# EAGLE board 2009_12_01_sevenSegmentWatch_01_01_PANEL (EAGLE 4.16)
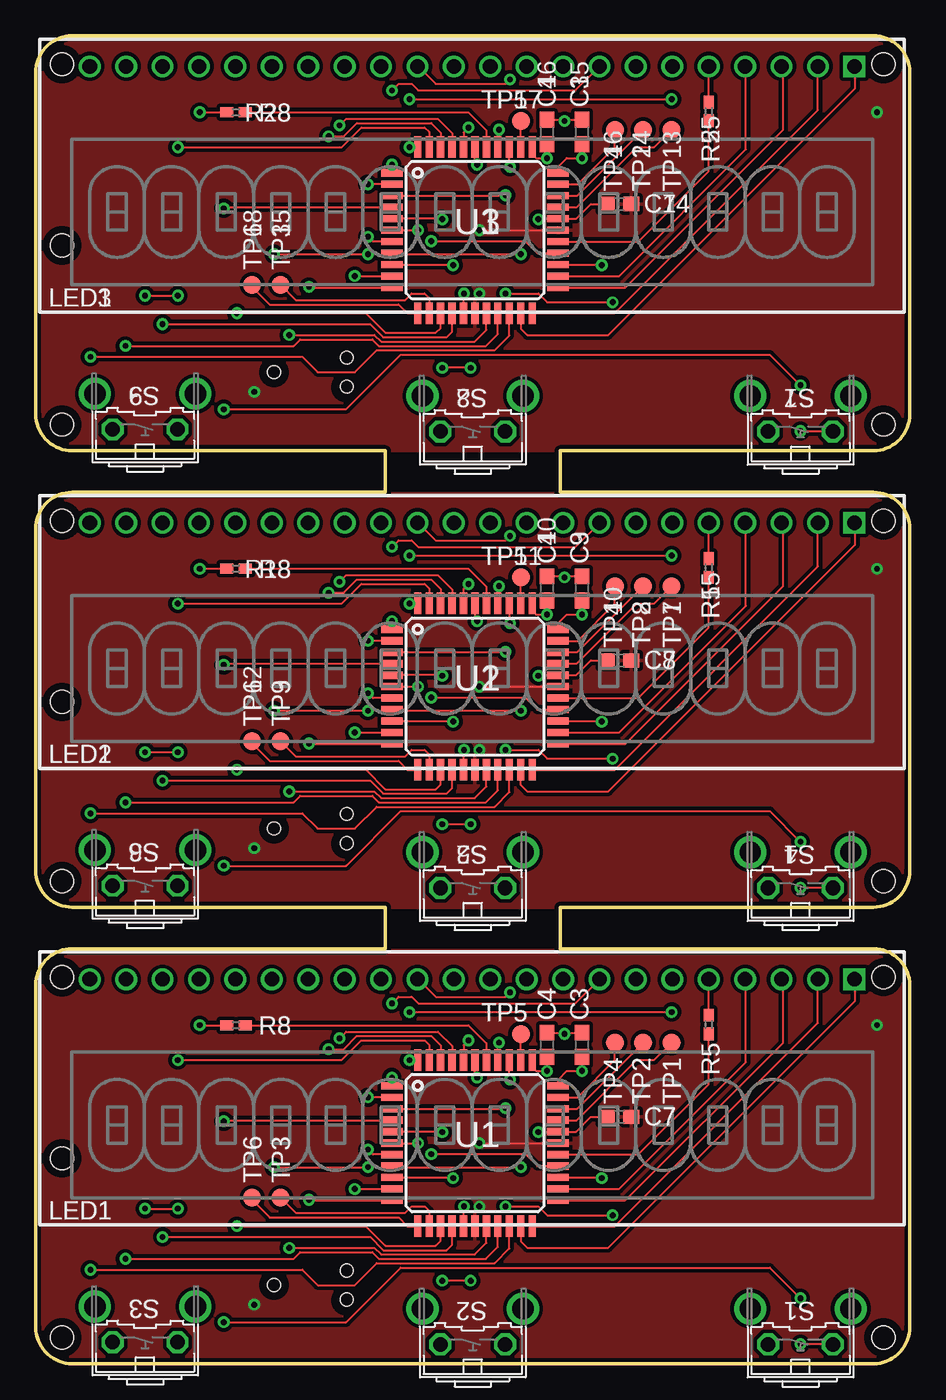
[diagram p0: board, top side]
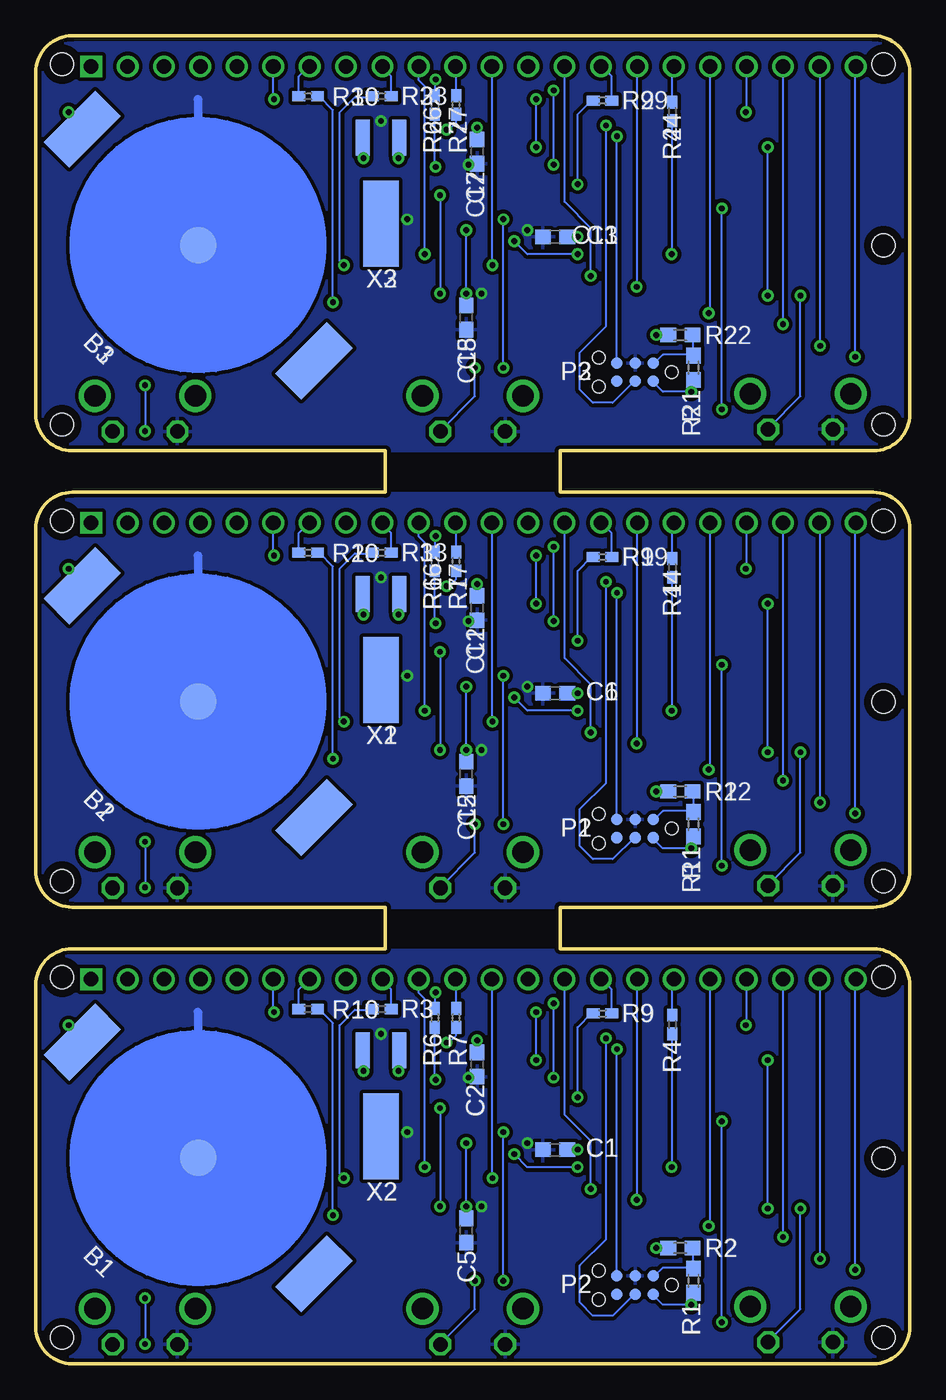
[diagram p1: board, bottom side, seen from below]

Size 60.96 x 92.66 mm. Coordinates in mm from the lower left corner, seen from the top.
Outline: 36.58,63.7 36.58,60.81 58.42,60.81 arc-90 60.96,58.27 60.96,34.39 arc-90 58.42,31.85 36.58,31.85 36.58,28.96 58.42,28.96 arc-90 60.96,26.42 60.96,2.54 arc-90 58.42,0 2.54,0 arc-90 0,2.54 0,26.42 arc-90 2.54,28.96 24.38,28.96 24.38,31.85 2.54,31.85 arc-90 0,34.39 0,58.27 arc-90 2.54,60.81 24.38,60.81 24.38,63.7 2.54,63.7 arc-90 0,66.24 0,90.12 arc-90 2.54,92.66 58.42,92.66 arc-90 60.96,90.12 60.96,66.24 arc-90 58.42,63.7 36.58,63.7
Copper layers (1*16): Top 0.0356mm / dielectric 0.2007mm / Bottom 0.0356mm
Design rules "PCBExpress_E2": minimum track width 6mil, minimum drill 16mil, track to track 6mil, track to pad 6mil, pad to pad 6mil, via to via 6mil, smd to smd 0mil, copper to edge 10mil, drill to drill 8mil, minimum pad ring 10mil, minimum via ring 8mil, stop-mask expansion 4mil, vias tented up to drill 16mil, thermal gap 10mil
Holes 1.6 mm at 1.83,1.83 59.13,1.83 59.13,26.97 1.83,26.97 1.83,14.33 1.83,33.68 59.13,33.68 59.13,58.83 1.83,58.83 1.83,46.18 1.83,65.53 59.13,65.53 59.13,90.68 1.83,90.68 1.83,78.03
tRestrict: area 20.9,5.8 to 22.4,7.3; area 20.9,3.6 to 22.4,5.2; area 15.8,4.7 to 17.4,6.3; area 0.8,0.8 to 2.9,2.9; area 58.1,0.8 to 60.2,2.9; area 58.1,25.9 to 60.2,28; area 0.8,25.9 to 2.9,28.1; area 0.8,13.2 to 2.9,15.4; area 20.9,37.6 to 22.4,39.2; area 20.9,35.5 to 22.4,37; area 15.8,36.6 to 17.4,38.1; area 0.8,32.6 to 2.9,34.8; 12 more areas
bRestrict: area 20.9,5.8 to 22.4,7.3; area 20.9,3.6 to 22.4,5.2; area 15.8,4.7 to 17.4,6.2; area 0.7,25.9 to 2.9,28.1; area 58,25.9 to 60.2,28.1; area 58,0.7 to 60.2,2.9; area 0.8,0.8 to 2.9,2.9; area 0.8,13.2 to 2.9,15.4; area 20.9,37.6 to 22.4,39.2; area 20.9,35.5 to 22.4,37; area 15.8,36.6 to 17.4,38.1; area 0.7,57.7 to 2.9,59.9; 12 more areas

## Footprints (pad centres in the part's own frame; a part is rotated, then mirrored left to right if it is on the bottom)
BAT-HLD-001 = smd 2.54 x 2.54: N 0,0 | smd 2.54 x 5.08: P1 -11.43,0; P2 11.43,0
C0603 = smd 1.1 x 1: 1 -0.85,0; 2 0.85,0
7SEG_LED_14DIG = drill 1.016 square: 1 -26.67,-7.62 | drill 1.016 round: 2 -24.13,-7.62; 3 -21.59,-7.62; 4 -19.05,-7.62; 5 -16.51,-7.62; 6 -13.97,-7.62; 7 -11.43,-7.62; 8 -8.89,-7.62; 9 -6.35,-7.62; 10 -3.81,-7.62; 11 -1.27,-7.62; 12 1.27,-7.62; 13 3.81,-7.62; 14 6.35,-7.62; 15 8.89,-7.62; 16 11.43,-7.62; 17 13.97,-7.62; 18 16.51,-7.62; 19 19.05,-7.62; 20 21.59,-7.62; 21 24.13,-7.62; 22 26.67,-7.62
TC2030-MCP-NL = smd 0.787 x 0.787: 1 1.27,-0.635; 2 1.27,0.635; 3 2.54,-0.635; 4 2.54,0.635; 5 3.81,-0.635; 6 3.81,0.635 | hole 0.889: 0,0; 5.08,-1.016; 5.08,1.016
R0603 = smd 1.1 x 1: 1 -0.85,0; 2 0.85,0
R0402 = smd 0.9 x 0.7: 1 -0.65,0; 2 0.65,0
B3F-31XX = drill 1.016 octagon: 1 -2.261,-1.245; 2 2.261,-1.245 | drill 1.499 pad 2.159 round: 3 -3.505,1.245; 4 3.505,1.245
B1,27 = smd 1.27 x 1.27: PP 0,0
TQFP44 = smd 1.5 x 0.5: 1 -5.8,4; 2 -5.8,3.2; 3 -5.8,2.4; 4 -5.8,1.6; 5 -5.8,0.8; 6 -5.8,0; 7 -5.8,-0.8; 8 -5.8,-1.6; 9 -5.8,-2.4; 10 -5.8,-3.2; 11 -5.8,-4; 23 5.8,-4; 24 5.8,-3.2; 25 5.8,-2.4; 26 5.8,-1.6; 27 5.8,-0.8; 28 5.8,0; 29 5.8,0.8; 30 5.8,1.6; 31 5.8,2.4; 32 5.8,3.2; 33 5.8,4 | smd 0.5 x 1.5: 12 -4,-5.8; 13 -3.2,-5.8; 14 -2.4,-5.8; 15 -1.6,-5.8; 16 -0.8,-5.8; 17 0,-5.8; 18 0.8,-5.8; 19 1.6,-5.8; 20 2.4,-5.8; 21 3.2,-5.8; 22 4,-5.8; 34 4,5.8; 35 3.2,5.8; 36 2.4,5.8; 37 1.6,5.8; 38 0.8,5.8; 39 0,5.8; 40 -0.8,5.8; 41 -1.6,5.8; 42 -2.4,5.8; 43 -3.2,5.8; 44 -4,5.8
CYL_6MM_2MM_SMD = smd 6 x 2.5: 1 -2.125,0 | smd 2.5 x 1: 2 3.875,-1.27; 3 3.875,1.27

## Placement (x,y rotation side)
B1  BAT-HLD-001  [BAT-HLD-001]  49.64,14.35 315 bottom
B2  BAT-HLD-001  [BAT-HLD-001]  49.64,46.2 315 bottom
B3  BAT-HLD-001  [BAT-HLD-001]  49.64,78.06 315 bottom
C1  10UF  [C0603]  24.74,14.94 180 bottom
C2  0.1UF  [C0603]  30.18,20.88 270 bottom
C3  12.5PF  [C0603]  38.1,22.25 90 top
C4  12.5PF  [C0603]  35.66,22.25 90 top
C5  0.1UF  [C0603]  30.94,9.3 270 bottom
C6  10UF  [C0603]  24.74,46.79 180 bottom
C7  0.1UF  [C0603]  40.69,17.22 180 top
C8  0.1UF  [C0603]  40.69,49.07 180 top
C9  12.5PF  [C0603]  38.1,54.1 90 top
C10  12.5PF  [C0603]  35.66,54.1 90 top
C11  0.1UF  [C0603]  30.18,52.73 270 bottom
C12  0.1UF  [C0603]  30.94,41.15 270 bottom
C13  10UF  [C0603]  24.74,78.64 180 bottom
C14  0.1UF  [C0603]  40.69,80.92 180 top
C15  12.5PF  [C0603]  38.1,85.95 90 top
C16  12.5PF  [C0603]  35.66,85.95 90 top
C17  0.1UF  [C0603]  30.18,84.58 270 bottom
C18  0.1UF  [C0603]  30.94,73 270 bottom
LED1  7SEG_LED_14DIG  [7SEG_LED_14DIG]  30.43,19.2 180 top
LED2  7SEG_LED_14DIG  [7SEG_LED_14DIG]  30.43,51.05 180 top
LED3  7SEG_LED_14DIG  [7SEG_LED_14DIG]  30.43,82.91 180 top
P1  TC2030-MCP-NL  [TC2030-MCP-NL]  16.61,37.34 180 bottom
P2  TC2030-MCP-NL  [TC2030-MCP-NL]  16.61,5.49 180 bottom
P3  TC2030-MCP-NL  [TC2030-MCP-NL]  16.61,69.19 180 bottom
R1  10K  [R0603]  15.09,5.79 270 bottom
R2  100  [R0603]  16,8.08 0 bottom
R3  325  [R0402]  36.83,24.74 0 bottom
R4  325  [R0402]  16.56,23.67 90 bottom
R5  325  [R0402]  46.94,23.67 90 top
R6  325  [R0402]  33.12,24.13 90 bottom
R7  325  [R0402]  31.65,24.13 90 bottom
R8  325  [R0402]  13.97,23.62 180 top
R9  325  [R0402]  21.44,24.43 0 bottom
R10  325  [R0402]  41.96,24.74 180 bottom
R11  10K  [R0603]  15.09,37.64 270 bottom
R12  100  [R0603]  16,39.93 0 bottom
R13  325  [R0402]  36.83,56.59 0 bottom
R14  325  [R0402]  16.56,55.52 90 bottom
R15  325  [R0402]  46.94,55.52 90 top
R16  325  [R0402]  33.12,55.98 90 bottom
R17  325  [R0402]  31.65,55.98 90 bottom
R18  325  [R0402]  13.97,55.47 180 top
R19  325  [R0402]  21.44,56.29 0 bottom
R20  325  [R0402]  41.96,56.59 180 bottom
R21  10K  [R0603]  15.09,69.49 270 bottom
R22  100  [R0603]  16,71.78 0 bottom
R23  325  [R0402]  36.83,88.44 0 bottom
R24  325  [R0402]  16.56,87.38 90 bottom
R25  325  [R0402]  46.94,87.38 90 top
R26  325  [R0402]  33.12,87.83 90 bottom
R27  325  [R0402]  31.65,87.83 90 bottom
R28  325  [R0402]  13.97,87.33 180 top
R29  325  [R0402]  21.44,88.14 0 bottom
R30  325  [R0402]  41.96,88.44 180 bottom
S1  [B3F-31XX]  53.34,2.59 0 top
S2  [B3F-31XX]  30.48,2.59 0 top
S3  [B3F-31XX]  7.62,2.74 0 top
S4  [B3F-31XX]  53.34,34.44 0 top
S5  [B3F-31XX]  30.48,34.44 0 top
S6  [B3F-31XX]  7.62,34.59 0 top
S7  [B3F-31XX]  53.34,66.29 0 top
S8  [B3F-31XX]  30.48,66.29 0 top
S9  [B3F-31XX]  7.62,66.45 0 top
TP1  TPB1,27  [B1,27]  44.35,22.4 0 top
TP2  TPB1,27  [B1,27]  42.37,22.4 0 top
TP3  TPB1,27  [B1,27]  17.07,11.58 0 top
TP4  TPB1,27  [B1,27]  40.39,22.4 0 top
TP5  TPB1,27  [B1,27]  33.83,23.01 0 top
TP6  TPB1,27  [B1,27]  15.09,11.58 0 top
TP7  TPB1,27  [B1,27]  44.35,54.25 0 top
TP8  TPB1,27  [B1,27]  42.37,54.25 0 top
TP9  TPB1,27  [B1,27]  17.07,43.43 0 top
TP10  TPB1,27  [B1,27]  40.39,54.25 0 top
TP11  TPB1,27  [B1,27]  33.83,54.86 0 top
TP12  TPB1,27  [B1,27]  15.09,43.43 0 top
TP13  TPB1,27  [B1,27]  44.35,86.11 0 top
TP14  TPB1,27  [B1,27]  42.37,86.11 0 top
TP15  TPB1,27  [B1,27]  17.07,75.29 0 top
TP16  TPB1,27  [B1,27]  40.39,86.11 0 top
TP17  TPB1,27  [B1,27]  33.83,86.72 0 top
TP18  TPB1,27  [B1,27]  15.09,75.29 0 top
U1  PIC24FJ32GA104PT  [TQFP44]  30.63,15.39 0 top
U2  PIC24FJ32GA104PT  [TQFP44]  30.63,47.24 0 top
U3  PIC24FJ32GA104PT  [TQFP44]  30.63,79.1 0 top
X1  AB26TRB-32.768KHZ-T  [CYL_6MM_2MM_SMD]  36.88,49.83 90 bottom
X2  AB26TRB-32.768KHZ-T  [CYL_6MM_2MM_SMD]  36.88,17.98 90 bottom
X3  AB26TRB-32.768KHZ-T  [CYL_6MM_2MM_SMD]  36.88,81.69 90 bottom

## Library data of the parts
B1-B3 LED1-LED3 U1-U3 = sevenSegmentWatch
C1-C18 R1-R30 = rcl
P1-P3 = raveGearControl
S1-S9 = switch-omron
TP1-TP18 = testpad
X1-X3 = raveGearControl2

## Nets
C1: LED1.1 U1.21
C2: LED1.2 U1.22
C3: LED1.3 U1.23
C4: LED1.4 U1.24
C5: LED1.6 U1.44
C6: LED1.8 U1.1
C7: LED1.10 U1.8
C8: LED1.12 U1.9
C9: LED1.14 U1.10
C10: LED1.16 U1.11
C11: LED1.18 U1.14
C12: LED1.20 U1.15
C13: LED1.21 U1.19
C14: LED1.22 U1.20
C15: LED2.1 U2.21
C16: LED2.2 U2.22
C17: LED2.3 U2.23
C18: LED2.4 U2.24
C19: LED2.6 U2.44
C20: LED2.8 U2.1
C21: LED2.10 U2.8
C22: LED2.12 U2.9
C23: LED2.14 U2.10
C24: LED2.16 U2.11
C25: LED2.18 U2.14
C26: LED2.20 U2.15
C27: LED2.21 U2.19
C28: LED2.22 U2.20
C29: LED3.1 U3.21
C30: LED3.2 U3.22
C31: LED3.3 U3.23
C32: LED3.4 U3.24
C33: LED3.6 U3.44
C34: LED3.8 U3.1
C35: LED3.10 U3.8
C36: LED3.12 U3.9
C37: LED3.14 U3.10
C38: LED3.16 U3.11
C39: LED3.18 U3.14
C40: LED3.20 U3.15
C41: LED3.21 U3.19
C42: LED3.22 U3.20
GND: B1.N C1.2 C2.2 C3.2 C4.2 C5.2 C7.2 P2.3 S1.1 S2.1 S3.1 U1.6 U1.16 U1.29 U1.39
GND1: B2.N C6.2 C8.2 C9.2 C10.2 C11.2 C12.2 P1.3 S4.1 S5.1 S6.1 U2.6 U2.16 U2.29 U2.39
GND2: B3.N C13.2 C14.2 C15.2 C16.2 C17.2 C18.2 P3.3 S7.1 S8.1 S9.1 U3.6 U3.16 U3.29 U3.39
MCLR#: P2.1 R1.1 R2.2
MCLR#1: P1.1 R11.1 R12.2
MCLR#2: P3.1 R21.1 R22.2
N$1: C2.1 U1.40
N$2: R2.1 U1.18
N$3: C6.1 U2.7
N$4: C11.1 U2.40
N$5: R12.1 U2.18
N$6: C13.1 U3.7
N$7: C1.1 U1.7
N$8: C17.1 U3.40
N$9: R22.1 U3.18
PGC: P2.5 U1.42
PGC1: P1.5 U2.42
PGC2: P3.5 U3.42
PGD: P2.4 U1.41
PGD1: P1.4 U2.41
PGD2: P3.4 U3.41
RA1: TP7.PP U2.30
RA2: TP1.PP U1.30
RA3: TP2.PP U1.31
RA4: TP8.PP U2.31
RA5: TP9.PP U2.13
RA6: TP10.PP U2.32
RA7: TP3.PP U1.13
RA8: TP4.PP U1.32
RA9: TP5.PP U1.35
RA10: TP6.PP U1.12
RA11: TP11.PP U2.35
RA12: TP12.PP U2.12
RA13: TP13.PP U3.30
RA14: TP14.PP U3.31
RA15: TP15.PP U3.13
RA16: TP16.PP U3.32
RA17: TP17.PP U3.35
RA18: TP18.PP U3.12
SEGA: R3.1 U1.25
SEGA1: R13.1 U2.25
SEGA2: R23.1 U3.25
SEGA_LIM: LED1.9 R3.2
SEGA_LIM1: LED2.9 R13.2
SEGA_LIM2: LED3.9 R23.2
SEGB: R4.1 U1.26
SEGB1: R14.1 U2.26
SEGB2: R24.1 U3.26
SEGB_LIM: LED1.17 R4.2
SEGB_LIM1: LED2.17 R14.2
SEGB_LIM2: LED3.17 R24.2
SEGC: R5.1 U1.27
SEGC1: R15.1 U2.27
SEGC2: R25.1 U3.27
SEGC_LIM: LED1.5 R5.2
SEGC_LIM1: LED2.5 R15.2
SEGC_LIM2: LED3.5 R25.2
SEGD: R6.1 U1.36
SEGD1: R16.1 U2.36
SEGD2: R26.1 U3.36
SEGD_LIM: LED1.13 R6.2
SEGD_LIM1: LED2.13 R16.2
SEGD_LIM2: LED3.13 R26.2
SEGDP: R10.1 U1.3
SEGDP1: R20.1 U2.3
SEGDP2: R30.1 U3.3
SEGDP_LIM: LED1.7 R10.2
SEGDP_LIM1: LED2.7 R20.2
SEGDP_LIM2: LED3.7 R30.2
SEGE: R7.1 U1.37
SEGE1: R17.1 U2.37
SEGE2: R27.1 U3.37
SEGE_LIM: LED1.11 R7.2
SEGE_LIM1: LED2.11 R17.2
SEGE_LIM2: LED3.11 R27.2
SEGF: R8.1 U1.38
SEGF1: R18.1 U2.38
SEGF2: R28.1 U3.38
SEGF_LIM: LED1.19 R8.2
SEGF_LIM1: LED2.19 R18.2
SEGF_LIM2: LED3.19 R28.2
SEGG: R9.1 U1.2
SEGG1: R19.1 U2.2
SEGG2: R29.1 U3.2
SEGG_LIM: LED1.15 R9.2
SEGG_LIM1: LED2.15 R19.2
SEGG_LIM2: LED3.15 R29.2
SW1: S1.2 U1.4
SW2: S2.2 U1.5
SW3: S3.2 U1.43
SW4: S4.2 U2.4
SW5: S5.2 U2.5
SW6: S6.2 U2.43
SW7: S7.2 U3.4
SW8: S8.2 U3.5
SW9: S9.2 U3.43
VDD: B1.P1 C5.1 C7.1 P2.2 R1.2 U1.17 U1.28
VDD1: B2.P1 C8.1 C12.1 P1.2 R11.2 U2.17 U2.28
VDD2: B3.P1 C14.1 C18.1 P3.2 R21.2 U3.17 U3.28
XIN1: C9.1 U2.33 X1.3
XIN2: C15.1 U3.33 X3.3
XIN32: C3.1 U1.33 X2.3
XOUT1: C10.1 U2.34 X1.2
XOUT2: C16.1 U3.34 X3.2
XOUT32: C4.1 U1.34 X2.2

## Tracks (layer width: path | path; a pad name or v marks a point on that pad's centre or on a via)
C1
  Top 0.152: U1.21 33.83,8.54 34.29,8.08 39.93,8.08 57.15,25.3 57.15,26.82 LED1.1
C2
  Top 0.152: U1.22 40.38,9.59 54.56,23.77 LED1.2
C3
  Top 0.152: U1.23 41.11,11.39 52.12,22.4 52.12,26.67 51.97,26.82 LED1.3
C4
  Top 0.152: U1.24 40.69,12.19 49.53,21.03 49.53,26.82 LED1.4
C5  (via drill 0.41)
  Top 0.152: U1.44 26.07,21.19 v26.06,21.18 | v26.06,24.54 v44.35,24.54
  Bottom 0.152: LED1.6 44.4,24.43 v44.35,24.54 | v26.06,21.18 v26.06,24.54
C6  (via drill 0.41)
  Top 0.152: v24.84,25.15 25.3,25.6 26.21,25.6 26.67,25.15 37.64,25.15 LED1.8 | U1.1 v24.83,19.96 v24.84,19.96
  Bottom 0.152: v24.84,19.96 v24.84,25.15
C7  (via drill 0.41)
  Top 0.152: U1.8 24.83,13.86 24.84,13.87 24.99,13.72 v33.83,13.72
  Bottom 0.152: LED1.10 34.24,25.86 33.83,25.45 v33.83,13.72
C8  (via drill 0.41)
  Top 0.152: U1.9 29.07,12.99 v29.11,12.95
  Bottom 0.152: LED1.12 29.11,26.82 v29.11,12.95
C9  (via drill 0.41)
  Top 0.152: v22.25,12.19 U1.10 | v22.25,12.19
  Bottom 0.152: LED1.14 24.08,17.37 22.25,15.54 v22.25,12.19
C10  (via drill 0.41)
  Top 0.152: v19.05,11.43 18.9,11.43 18.93,11.39 U1.11
  Bottom 0.152: LED1.16 19,11.48 v19.05,11.43
C11  (via drill 0.41)
  Top 0.152: U1.14 28.23,8.57 27.89,8.23 24.38,8.23 23.01,9.6 v14.02,9.6
  Bottom 0.152: LED1.18 13.92,9.65 v14.02,9.6
C12  (via drill 0.41)
  Top 0.152: U1.15 29.03,8.31 28.65,7.92 24.23,7.92 23.32,8.84 v8.84,8.84
  Bottom 0.152: v8.84,8.84 LED1.20
C13  (via drill 0.41)
  Top 0.152: U1.19 32.23,8.15 31.39,7.32 23.93,7.32 23.47,7.77 18.44,7.77 17.98,7.32 v6.25,7.32
  Bottom 0.152: LED1.21 6.3,26.87 6.25,26.82 v6.25,7.32
C14  (via drill 0.41)
  Top 0.152: U1.20 33.03,8.04 32,7.01 23.77,7.01 22.25,5.49 19.66,5.49 18.59,6.55 v3.81,6.55
  Bottom 0.152: LED1.22 3.76,26.87 3.81,26.82 v3.81,6.55
C15
  Top 0.152: U2.21 33.83,40.39 34.29,39.93 39.93,39.93 57.15,57.15 57.15,58.67 LED2.1
C16
  Top 0.152: U2.22 40.38,41.44 54.56,55.63 LED2.2
C17
  Top 0.152: U2.23 41.11,43.24 52.12,54.25 52.12,58.52 51.97,58.67 LED2.3
C18
  Top 0.152: U2.24 40.69,44.04 49.53,52.88 49.53,58.67 LED2.4
C19  (via drill 0.41)
  Top 0.152: U2.44 v26.07,53.04 v26.06,53.03 | v26.06,56.39 v44.35,56.39
  Bottom 0.152: LED2.6 44.4,56.29 v44.35,56.39 | v26.06,53.03 v26.06,56.39
C20  (via drill 0.41)
  Top 0.152: v24.84,57 25.3,57.45 26.21,57.45 26.67,57 37.64,57 LED2.8 | U2.1 24.83,51.81 v24.84,51.82
  Bottom 0.152: v24.84,51.82 v24.84,57
C21  (via drill 0.41)
  Top 0.152: U2.8 24.83,45.71 24.84,45.72 24.99,45.57 v33.83,45.57
  Bottom 0.152: LED2.10 34.24,57.71 33.83,57.3 v33.83,45.57
C22  (via drill 0.41)
  Top 0.152: U2.9 29.07,44.84 v29.11,44.81
  Bottom 0.152: LED2.12 29.11,58.67 v29.11,44.81
C23  (via drill 0.41)
  Top 0.152: v22.25,44.04 U2.10 | v22.25,44.04
  Bottom 0.152: LED2.14 24.08,49.23 22.25,47.4 v22.25,44.04
C24  (via drill 0.41)
  Top 0.152: v19.05,43.28 18.9,43.28 18.93,43.24 U2.11
  Bottom 0.152: LED2.16 19,43.33 v19.05,43.28
C25  (via drill 0.41)
  Top 0.152: U2.14 28.23,40.42 27.89,40.08 24.38,40.08 23.01,41.45 v14.02,41.45
  Bottom 0.152: LED2.18 13.92,41.5 v14.02,41.45
C26  (via drill 0.41)
  Top 0.152: U2.15 29.03,40.16 28.65,39.78 24.23,39.78 23.32,40.69 v8.84,40.69
  Bottom 0.152: v8.84,40.69 LED2.20
C27  (via drill 0.41)
  Top 0.152: U2.19 32.23,40.01 31.39,39.17 23.93,39.17 23.47,39.62 18.44,39.62 17.98,39.17 v6.25,39.17
  Bottom 0.152: LED2.21 6.3,58.73 6.25,58.67 v6.25,39.17
C28  (via drill 0.41)
  Top 0.152: U2.20 33.03,39.89 32,38.86 23.77,38.86 22.25,37.34 19.66,37.34 18.59,38.41 v3.81,38.41
  Bottom 0.152: LED2.22 3.76,58.73 3.81,58.67 v3.81,38.41
C29
  Top 0.152: U3.21 33.83,72.24 34.29,71.78 39.93,71.78 57.15,89 57.15,90.53 LED3.1
C30
  Top 0.152: U3.22 40.38,73.3 54.56,87.48 LED3.2
C31
  Top 0.152: U3.23 41.11,75.1 52.12,86.11 52.12,90.37 51.97,90.53 LED3.3
C32
  Top 0.152: U3.24 40.69,75.9 49.53,84.73 49.53,90.53 LED3.4
C33  (via drill 0.41)
  Top 0.152: U3.44 v26.07,84.9 v26.06,84.89 | v26.06,88.24 v44.35,88.24
  Bottom 0.152: LED3.6 44.4,88.14 v44.35,88.24 | v26.06,84.89 v26.06,88.24
C34  (via drill 0.41)
  Top 0.152: v24.84,88.85 25.3,89.31 26.21,89.31 26.67,88.85 37.64,88.85 LED3.8 | U3.1 v24.83,83.66 v24.84,83.67
  Bottom 0.152: v24.84,83.67 v24.84,88.85
C35  (via drill 0.41)
  Top 0.152: U3.8 24.83,77.56 24.84,77.57 24.99,77.42 v33.83,77.42
  Bottom 0.152: LED3.10 34.24,89.56 33.83,89.15 v33.83,77.42
C36  (via drill 0.41)
  Top 0.152: U3.9 29.07,76.7 v29.11,76.66
  Bottom 0.152: LED3.12 29.11,90.53 v29.11,76.66
C37  (via drill 0.41)
  Top 0.152: U3.10 v22.25,75.9 v22.25,75.89
  Bottom 0.152: LED3.14 24.08,81.08 22.25,79.25 v22.25,75.89
C38  (via drill 0.41)
  Top 0.152: v19.05,75.13 18.9,75.13 18.93,75.1 U3.11
  Bottom 0.152: LED3.16 19,75.18 v19.05,75.13
C39  (via drill 0.41)
  Top 0.152: U3.14 28.23,72.28 27.89,71.93 24.38,71.93 23.01,73.3 v14.02,73.3
  Bottom 0.152: LED3.18 13.92,73.36 v14.02,73.3
C40  (via drill 0.41)
  Top 0.152: U3.15 29.03,72.01 28.65,71.63 24.23,71.63 23.32,72.54 v8.84,72.54
  Bottom 0.152: v8.84,72.54 LED3.20
C41  (via drill 0.41)
  Top 0.152: U3.19 32.23,71.86 31.39,71.02 23.93,71.02 23.47,71.48 18.44,71.48 17.98,71.02 v6.25,71.02
  Bottom 0.152: LED3.21 6.3,90.58 6.25,90.53 v6.25,71.02
C42  (via drill 0.41)
  Top 0.152: U3.20 33.03,71.74 32,70.71 23.77,70.71 22.25,69.19 19.66,69.19 18.59,70.26 v3.81,70.26
  Bottom 0.152: LED3.22 3.76,90.58 3.81,90.53 v3.81,70.26
GND  (via drill 0.41)
  Top 0.152: U1.6 v26.67,15.39 | v35.05,16.15 35.09,16.19 U1.29 37.68,16.19 38.71,17.22 C7.2 | U1.39 30.63,20.12 v30.79,19.96 | U1.16 29.83,10.94 v29.87,10.97 | C4.2 36.79,23.1 v36.88,23.01 36.97,23.1 C3.2
  Bottom 0.61: B1.N 49.64,24.49 49.68,24.54
  pour Bottom (isolate 0.254): 0,28.85 60.91,28.85 60.91,0 0,0
GND1  (via drill 0.41)
  Top 0.152: U2.6 v26.67,47.24 | v35.05,48.01 35.09,48.04 U2.29 37.68,48.04 38.71,49.07 C8.2 | U2.39 30.63,51.97 v30.79,51.82 | U2.16 29.83,42.79 v29.87,42.82 | C10.2 36.79,54.95 v36.88,54.86 36.97,54.95 C9.2
  Bottom 0.61: B2.N 49.64,56.34 49.68,56.39
  pour Bottom (isolate 0.254): 0,60.71 60.91,60.71 60.91,31.85 0,31.85
GND2  (via drill 0.41)
  Top 0.152: U3.6 v26.67,79.1 | v35.05,79.86 35.09,79.9 U3.29 37.68,79.9 38.71,80.92 C14.2 | U3.39 30.63,83.82 v30.79,83.67 | U3.16 29.83,74.64 v29.87,74.68 | C16.2 36.79,86.8 v36.88,86.72 36.97,86.8 C15.2
  Bottom 0.61: B3.N 49.64,88.19 49.68,88.24
  pour Bottom (isolate 0.254): 0,92.56 60.91,92.56 60.91,63.7 0,63.7
MCLR#
  Bottom 0.152: R2.2 15.09,8.08 15.09,6.71 | P2.1 17.8,6.12 17.22,6.71 15.09,6.71 | R1.1 15.09,6.71
MCLR#1
  Bottom 0.152: R12.2 15.09,39.93 15.09,38.56 | P1.1 17.8,37.97 17.22,38.56 15.09,38.56 | 15.09,38.56 R11.1
MCLR#2
  Bottom 0.152: R22.2 15.09,71.78 15.09,70.41 | P3.1 17.8,69.83 17.22,70.41 15.09,70.41 | R21.1 15.09,70.41
N$1  (via drill 0.41)
  Top 0.152: U1.40 29.83,22.21 v30.18,22.55
  Bottom 0.152: C2.1 v30.18,22.55
N$2  (via drill 0.41)
  Top 0.152: U1.18 31.43,8.42 30.63,7.62 24.08,7.62 23.62,8.08 v17.68,8.08
  Bottom 0.152: R2.1 v17.68,8.08
N$3  (via drill 0.41)
  Top 0.152: U2.7 23.51,46.44 v23.16,46.79
  Bottom 0.152: v23.16,46.79 C6.1
N$4  (via drill 0.41)
  Top 0.152: U2.40 29.83,54.06 v30.18,54.41
  Bottom 0.152: v30.18,54.41 C11.1
N$5  (via drill 0.41)
  Top 0.152: U2.18 31.43,40.27 30.63,39.47 24.08,39.47 23.62,39.93 v17.68,39.93
  Bottom 0.152: R12.1 v17.68,39.93
N$6  (via drill 0.41)
  Top 0.152: U3.7 23.51,78.3 v23.16,78.64
  Bottom 0.152: v23.16,78.64 C13.1
N$7  (via drill 0.41)
  Top 0.152: U1.7 23.51,14.59 v23.16,14.94
  Bottom 0.152: v23.16,14.94 C1.1
N$8  (via drill 0.41)
  Top 0.152: U3.40 29.83,85.92 v30.18,86.26
  Bottom 0.152: C17.1 v30.18,86.26
N$9  (via drill 0.41)
  Top 0.152: U3.18 31.43,72.12 30.63,71.32 24.08,71.32 23.62,71.78 v17.68,71.78
  Bottom 0.152: R22.1 v17.68,71.78
PGC  (via drill 0.41)
  Top 0.152: U1.42 28.23,22.21 27.58,22.86 22.4,22.86 21.49,21.95 v20.42,21.95
  Bottom 0.152: 20.42,6.1 P2.5 v20.42,21.95
PGC1  (via drill 0.41)
  Top 0.152: U2.42 28.23,54.06 27.58,54.71 22.4,54.71 21.49,53.8 v20.42,53.8
  Bottom 0.152: 20.42,37.95 P1.5 v20.42,53.8
PGC2  (via drill 0.41)
  Top 0.152: U3.42 28.23,85.92 27.58,86.56 22.4,86.56 21.49,85.65 v20.42,85.65
  Bottom 0.152: 20.42,69.8 P3.5 v20.42,85.65
PGD  (via drill 0.41)
  Top 0.152: U1.41 29.03,22.17 28.04,23.16 21.64,23.16 v21.18,22.71
  Bottom 0.152: P2.4 19.23,4.85 20.73,3.35 22.1,3.35 23.01,4.27 23.01,6.86 21.18,8.69 v21.18,22.71
PGD1  (via drill 0.41)
  Top 0.152: U2.41 29.03,54.03 28.04,55.02 21.64,55.02 v21.18,54.56
  Bottom 0.152: P1.4 19.23,36.7 20.73,35.2 22.1,35.2 23.01,36.12 23.01,38.71 21.18,40.54 v21.18,54.56
PGD2  (via drill 0.41)
  Top 0.152: U3.41 29.03,85.88 28.04,86.87 21.64,86.87 v21.18,86.41
  Bottom 0.152: P3.4 19.23,68.56 20.73,67.06 22.1,67.06 23.01,67.97 23.01,70.56 21.18,72.39 v21.18,86.41
RA1
  Top 0.152: U2.30 37.72,48.84 41.91,53.03 43.13,53.03 TP7.PP
RA2
  Top 0.152: U1.30 37.72,16.99 41.91,21.18 43.13,21.18 TP1.PP
RA3
  Top 0.152: U1.31 37.76,17.79 TP2.PP
RA4
  Top 0.152: U2.31 37.76,49.64 TP8.PP
RA5
  Top 0.152: U2.13 27.43,42.52 27.13,42.82 26.21,42.82 25.76,42.37 18.14,42.37 TP9.PP
RA6
  Top 0.152: U2.32 37.8,50.44 40.39,53.03 TP10.PP
RA7
  Top 0.152: U1.13 27.43,10.67 27.13,10.97 26.21,10.97 25.76,10.52 18.14,10.52 TP3.PP
RA8
  Top 0.152: U1.32 37.8,18.59 40.39,21.18 TP4.PP
RA9
  Top 0.152: U1.35 TP5.PP
RA10
  Top 0.152: U1.12 25.92,9.59 25.3,10.21 16.31,10.21 15.09,11.43 TP6.PP
RA11
  Top 0.152: U2.35 TP11.PP
RA12
  Top 0.152: U2.12 25.92,41.44 25.3,42.06 16.31,42.06 15.09,43.28 TP12.PP
RA13
  Top 0.152: U3.30 37.72,80.7 41.91,84.89 43.13,84.89 TP13.PP
RA14
  Top 0.152: U3.31 37.76,81.5 TP14.PP
RA15
  Top 0.152: U3.13 27.43,74.37 27.13,74.68 26.21,74.68 25.76,74.22 18.14,74.22 TP15.PP
RA16
  Top 0.152: U3.32 37.8,82.3 40.39,84.89 TP16.PP
RA17
  Top 0.152: U3.35 TP17.PP
RA18
  Top 0.152: U3.12 25.92,73.3 25.3,73.91 16.31,73.91 15.09,75.13 TP18.PP
SEGA  (via drill 0.41)
  Top 0.152: U1.25 39.13,12.99 v39.47,12.95
  Bottom 0.152: v39.47,12.95 39.78,13.26 39.78,23.62 38.71,24.69 37.49,24.69 37.48,24.7 R3.1
SEGA1  (via drill 0.41)
  Top 0.152: U2.25 39.13,44.84 v39.47,44.81
  Bottom 0.152: v39.47,44.81 39.78,45.11 39.78,55.47 38.71,56.54 37.49,56.54 37.48,56.55 R13.1
SEGA2  (via drill 0.41)
  Top 0.152: U3.25 39.13,76.7 v39.47,76.66
  Bottom 0.152: v39.47,76.66 39.78,76.96 39.78,87.33 38.71,88.39 37.49,88.39 37.48,88.4 R23.1
SEGA_LIM
  Bottom 0.152: LED1.9 36.88,26.82 36.18,26.12 R3.2
SEGA_LIM1
  Bottom 0.152: LED2.9 36.88,58.67 36.18,57.97 R13.2
SEGA_LIM2
  Bottom 0.152: LED3.9 36.88,90.53 36.18,89.83 R23.2
SEGB  (via drill 0.41)
  Top 0.152: U1.26 34.98,13.79 34.14,14.63 v27.58,14.63 | v16.61,13.72 v23.16,13.72
  Bottom 0.152: v27.58,14.63 26.67,13.72 v23.16,13.72 | R4.1 16.56,13.82 v16.61,13.72
SEGB1  (via drill 0.41)
  Top 0.152: U2.26 34.98,45.64 34.14,46.48 v27.58,46.48 | v16.61,45.57 v23.16,45.57
  Bottom 0.152: v27.58,46.48 26.67,45.57 v23.16,45.57 | R14.1 16.56,45.67 v16.61,45.57
SEGB2  (via drill 0.41)
  Top 0.152: U3.26 34.98,77.5 34.14,78.33 v27.58,78.33 | v16.61,77.42 v23.16,77.42
  Bottom 0.152: v27.58,78.33 26.67,77.42 v23.16,77.42 | R24.1 16.56,77.52 v16.61,77.42
SEGB_LIM
  Bottom 0.152: LED1.17 16.46,26.67 16.56,26.57 R4.2
SEGB_LIM1
  Bottom 0.152: LED2.17 16.46,58.52 16.56,58.42 R14.2
SEGB_LIM2
  Bottom 0.152: LED3.17 16.46,90.37 16.56,90.27 R24.2
SEGC
  Top 0.152: U1.27 42.02,14.59 46.94,19.51 R5.1
SEGC1
  Top 0.152: U2.27 42.02,46.44 46.94,51.36 R15.1
SEGC2
  Top 0.152: U3.27 42.02,78.3 46.94,83.21 R25.1
SEGC_LIM
  Top 0.152: R5.2 LED1.5
SEGC_LIM1
  Top 0.152: R15.2 LED2.5
SEGC_LIM2
  Top 0.152: R25.2 LED3.5
SEGD  (via drill 0.41)
  Top 0.152: U1.36 33.03,19.85 v33.07,19.81
  Bottom 0.152: R6.1 33.12,19.86 v33.07,19.81
SEGD1  (via drill 0.41)
  Top 0.152: U2.36 33.03,51.7 v33.07,51.66
  Bottom 0.152: R16.1 33.12,51.71 v33.07,51.66
SEGD2  (via drill 0.41)
  Top 0.152: U3.36 33.03,83.55 v33.07,83.52
  Bottom 0.152: R26.1 33.12,83.57 v33.07,83.52
SEGD_LIM  (via drill 0.41)
  Top 0.152: v33.07,25.91 32.77,25.6 27.89,25.6 26.67,26.82 LED1.13
  Bottom 0.152: R6.2 33.12,25.86 v33.07,25.91
SEGD_LIM1  (via drill 0.41)
  Top 0.152: v33.07,57.76 32.77,57.45 27.89,57.45 26.67,58.67 LED2.13
  Bottom 0.152: R16.2 33.12,57.71 v33.07,57.76
SEGD_LIM2  (via drill 0.41)
  Top 0.152: v33.07,89.61 32.77,89.31 27.89,89.31 26.67,90.53 LED3.13
  Bottom 0.152: R26.2 33.12,89.56 v33.07,89.61
SEGDP  (via drill 0.41)
  Top 0.152: U1.3 32.73,17.79 v32.77,17.83 | v32.77,10.97 35.05,10.97 35.66,10.36 v40.23,10.36
  Bottom 0.152: v32.77,17.83 v32.77,10.97 | R10.1 41.2,24.74 40.23,23.77 v40.23,10.36
SEGDP1  (via drill 0.41)
  Top 0.152: U2.3 32.73,49.64 v32.77,49.68 | v32.77,42.82 35.05,42.82 35.66,42.22 v40.23,42.22
  Bottom 0.152: v32.77,49.68 v32.77,42.82 | R20.1 41.2,56.59 40.23,55.63 v40.23,42.22
SEGDP2  (via drill 0.41)
  Top 0.152: U3.3 32.73,81.5 v32.77,81.53 | v32.77,74.68 35.05,74.68 35.66,74.07 v40.23,74.07
  Bottom 0.152: v32.77,81.53 v32.77,74.68 | R30.1 41.2,88.44 40.23,87.48 v40.23,74.07
SEGDP_LIM
  Bottom 0.152: LED1.7 41.91,26.82 42.61,26.12 R10.2
SEGDP_LIM1
  Bottom 0.152: LED2.7 41.91,58.67 42.61,57.97 R20.2
SEGDP_LIM2
  Bottom 0.152: LED3.7 41.91,90.53 42.61,89.83 R30.2
SEGE  (via drill 0.41)
  Top 0.152: U1.37 32.23,22.33 v32.31,22.4
  Bottom 0.152: v32.31,22.4 32.16,22.4 31.65,22.91 R7.1
SEGE1  (via drill 0.41)
  Top 0.152: U2.37 32.23,54.18 v32.31,54.25
  Bottom 0.152: v32.31,54.25 32.16,54.25 31.65,54.76 R17.1
SEGE2  (via drill 0.41)
  Top 0.152: U3.37 32.23,86.03 v32.31,86.11
  Bottom 0.152: v32.31,86.11 32.16,86.11 31.65,86.61 R27.1
SEGE_LIM
  Bottom 0.152: R7.2 31.65,26.77 LED1.11
SEGE_LIM1
  Bottom 0.152: R17.2 31.65,58.62 LED2.11
SEGE_LIM2
  Bottom 0.152: R27.2 31.65,90.47 LED3.11
SEGF
  Top 0.152: U1.38 31.43,22.36 30.18,23.62 R8.1
SEGF1
  Top 0.152: U2.38 31.43,54.22 30.18,55.47 R18.1
SEGF2
  Top 0.152: U3.38 31.43,86.07 30.18,87.33 R28.1
SEGF_LIM  (via drill 0.41)
  Top 0.152: v11.43,23.62 R8.2
  Bottom 0.152: LED1.19 11.38,23.67 v11.43,23.62
SEGF_LIM1  (via drill 0.41)
  Top 0.152: v11.43,55.47 R18.2
  Bottom 0.152: LED2.19 11.38,55.52 v11.43,55.47
SEGF_LIM2  (via drill 0.41)
  Top 0.152: v11.43,87.33 R28.2
  Bottom 0.152: LED3.19 11.38,87.38 v11.43,87.33
SEGG  (via drill 0.41)
  Top 0.152: U1.2 v23.16,18.59
  Bottom 0.152: v23.16,18.59 23.16,23.47 22.2,24.43 R9.1
SEGG1  (via drill 0.41)
  Top 0.152: U2.2 v23.16,50.44 | v23.16,50.44
  Bottom 0.152: v23.16,50.44 23.16,55.32 22.2,56.29 R19.1
SEGG2  (via drill 0.41)
  Top 0.152: U3.2 v23.16,82.3 | v23.16,82.3
  Bottom 0.152: v23.16,82.3 23.16,87.17 22.2,88.14 R29.1
SEGG_LIM
  Bottom 0.152: LED1.15 21.49,26.82 20.79,26.12 R9.2
SEGG_LIM1
  Bottom 0.152: LED2.15 21.49,58.67 20.79,57.97 R19.2
SEGG_LIM2
  Bottom 0.152: LED3.15 21.49,90.53 20.79,89.83 R29.2
SW1  (via drill 0.41)
  Top 0.152: U1.4 13.18,16.99 v13.11,16.92 | v13.11,2.9 21.64,2.9 25.45,6.71 51.21,6.71 v53.34,4.57 | S1.2 55.63,1.37 v53.34,1.37
  Bottom 0.152: v13.11,2.9 v13.11,16.92 | v53.34,4.57 v53.34,1.37
SW2  (via drill 0.41)
  Top 0.152: U1.5 28.31,16.19 v28.35,16.15 | v30.33,5.79 v28.35,5.79
  Bottom 0.152: v28.35,5.79 v28.35,16.15 | S2.2 32.77,1.37 30.33,3.81 v30.33,5.79
SW3  (via drill 0.41)
  Top 0.152: U1.43 27.43,22.25 27.13,22.55 22.71,22.55 21.34,21.18 v9.91,21.18 | v7.62,10.82 v9.91,10.82
  Bottom 0.152: v9.91,10.82 v9.91,21.18 | S3.2 9.88,1.55 7.62,3.81 v7.62,10.82
SW4  (via drill 0.41)
  Top 0.152: U2.4 13.18,48.84 v13.11,48.77 | v13.11,34.75 21.64,34.75 25.45,38.56 51.21,38.56 v53.34,36.42 | S4.2 55.63,33.22 v53.34,33.22
  Bottom 0.152: v13.11,34.75 v13.11,48.77 | v53.34,36.42 v53.34,33.22
SW5  (via drill 0.41)
  Top 0.152: U2.5 28.31,48.04 v28.35,48.01 | v30.33,37.64 v28.35,37.64
  Bottom 0.152: v28.35,37.64 v28.35,48.01 | S5.2 32.77,33.22 30.33,35.66 v30.33,37.64
SW6  (via drill 0.41)
  Top 0.152: U2.43 27.43,54.1 27.13,54.41 22.71,54.41 21.34,53.03 v9.91,53.03 | v7.62,42.67 v9.91,42.67
  Bottom 0.152: v9.91,42.67 v9.91,53.03 | S6.2 9.88,33.4 7.62,35.66 v7.62,42.67
SW7  (via drill 0.41)
  Top 0.152: U3.4 13.18,80.7 v13.11,80.62 | v13.11,66.6 21.64,66.6 25.45,70.41 51.21,70.41 v53.34,68.28 | S7.2 55.63,65.08 v53.34,65.08
  Bottom 0.152: v13.11,66.6 v13.11,80.62 | v53.34,68.28 v53.34,65.08
SW8  (via drill 0.41)
  Top 0.152: U3.5 28.31,79.9 v28.35,79.86 | v30.33,69.49 v28.35,69.49
  Bottom 0.152: v28.35,69.49 v28.35,79.86 | S8.2 32.77,65.08 30.33,67.51 v30.33,69.49
SW9  (via drill 0.41)
  Top 0.152: U3.43 27.43,85.95 27.13,86.26 22.71,86.26 21.34,84.89 v9.91,84.89 | v7.62,74.52 v9.91,74.52
  Bottom 0.152: v9.91,74.52 v9.91,84.89 | S9.2 9.88,65.25 7.62,67.51 v7.62,74.52
VDD  (via drill 0.41)
  Top 0.152: v30.94,15.39 U1.28
  Bottom 0.152: v15.24,4.12 17.22,4.12 17.96,4.85 | v15.24,4.12 15.18,4.2 | 17.96,4.85 17.98,4.88 | 17.96,4.85 P2.2 | v15.24,4.12 15.09,4.27 R1.2 | C5.1 v30.94,10.97 v30.94,15.39
  Bottom 0.61: B1.P1 57.72,22.67 v58.67,23.62
  pour Top (isolate 0.254): 0,28.85 60.91,28.85 60.91,0 0,0
VDD1  (via drill 0.41)
  Top 0.152: v30.94,47.24 U2.28
  Bottom 0.152: v15.24,35.97 17.22,35.97 17.96,36.7 | v15.24,35.97 15.18,36.05 | 17.96,36.7 17.98,36.73 | 17.96,36.7 P1.2 | v15.24,35.97 15.09,36.12 R11.2 | C12.1 v30.94,42.82 v30.94,47.24
  Bottom 0.61: B2.P1 57.72,54.52 v58.67,55.47
  pour Top (isolate 0.254): 0,60.71 60.91,60.71 60.91,31.85 0,31.85
VDD2  (via drill 0.41)
  Top 0.152: v30.94,79.1 U3.28
  Bottom 0.152: v15.24,67.82 17.22,67.82 17.96,68.56 | v15.24,67.82 15.18,67.91 | 17.96,68.56 17.98,68.58 | 17.96,68.56 P3.2 | v15.24,67.82 15.09,67.97 R21.2 | C18.1 v30.94,74.68 v30.94,79.1
  Bottom 0.61: B3.P1 57.72,86.37 v58.67,87.33
  pour Top (isolate 0.254): 0,92.56 60.91,92.56 60.91,63.7 0,63.7
XIN1  (via drill 0.41)
  Top 0.152: U2.33 36.43,51.67 37.03,52.27 v38.1,52.27 C9.1
  Bottom 0.152: X1.3 38.15,52.32 v38.1,52.27
XIN2  (via drill 0.41)
  Top 0.152: U3.33 36.43,83.52 37.03,84.12 v38.1,84.12 C15.1
  Bottom 0.152: X3.3 38.15,84.18 v38.1,84.12
XIN32  (via drill 0.41)
  Top 0.152: U1.33 36.43,19.82 37.03,20.42 v38.1,20.42 C3.1
  Bottom 0.152: X2.3 38.15,20.47 v38.1,20.42
XOUT1  (via drill 0.41)
  Top 0.152: U2.34 34.63,52.54 34.9,52.27 v35.66,52.27 C10.1
  Bottom 0.152: X1.2 35.61,52.32 v35.66,52.27
XOUT2  (via drill 0.41)
  Top 0.152: U3.34 34.63,84.39 34.9,84.12 v35.66,84.12 C16.1
  Bottom 0.152: X3.2 35.61,84.18 v35.66,84.12
XOUT32  (via drill 0.41)
  Top 0.152: U1.34 34.63,20.69 34.9,20.42 v35.66,20.42 C4.1
  Bottom 0.152: X2.2 35.61,20.47 v35.66,20.42

## Text on the board
Document: (C) 2009 AKN | DISPLAY | ADJUST | (C) 2009 AKN | DISPLAY | ADJUST | (C) 2009 AKN | DISPLAY | ADJUST
_tNames: R8 | TP5 | C4 | C3 | R5 | TP4 | TP2 | TP1 | C7 | U1 | TP6 | TP3 | LED1 | S3 | S2 | S1 | R8 | TP5 | C4 | C3 | R5 | TP4 | TP2 | TP1 | C7 | U1 | TP6 | TP3 | LED1 | S3 | S2 | S1 | R8 | TP5 | C4 | C3 | R5 | TP4 | TP2 | TP1 | C7 | U1 | TP6 | TP3 | LED1 | S3 | S2 | S1
_bNames: R10 | R9 | R3 | R4 | R7 | R6 | C2 | C1 | X2 | C5 | R2 | B1 | P2 | R1 | R10 | R9 | R3 | R7 | R6 | R4 | C2 | C1 | X2 | C5 | R2 | B1 | P2 | R1 | R10 | R9 | R3 | R7 | R6 | R4 | C2 | C1 | X2 | C5 | R2 | B1 | P2 | R1